# EAGLE board piezo-preamp-tickler_V3-4_single-supply-OPA164 (EAGLE 8.5.0)
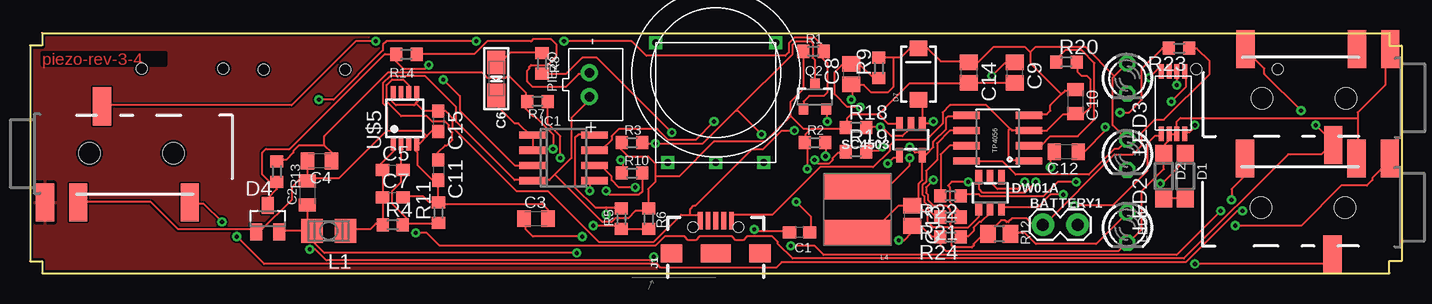
[diagram p0: board, top side]
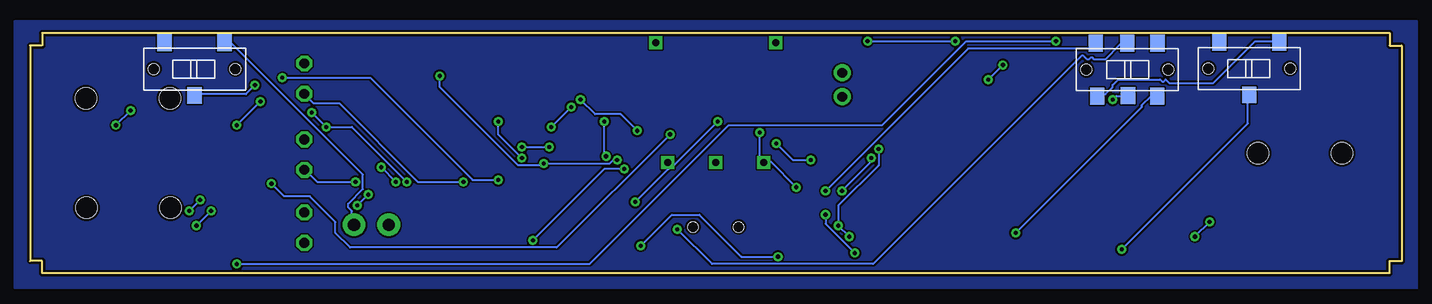
[diagram p1: board, bottom side, seen from below]

Size 114.3 x 20.03 mm. Coordinates in mm from the lower left corner, seen from the top.
Outline: 0,19 0,1 1.02,1 1.02,0 113.28,0 113.28,1.02 114.3,1.02 114.3,19 113.28,19 113.28,20.03 1,20.03 1,19 0,19
Copper layers (1*16): Top 0.035mm / dielectric 1.5mm / Bottom 0.035mm
Design rules "default *": minimum track width 6mil, minimum drill 0.35mm, track to track 6mil, track to pad 6mil, pad to pad 6mil, via to via 6mil, smd to smd 6mil, copper to edge 8mil, drill to drill 6mil, minimum pad ring 10mil, minimum via ring 8mil, stop-mask expansion 4mil, vias tented up to drill 20mil, thermal gap 10mil

## Footprints (pad centres in the part's own frame; a part is rotated, then mirrored left to right if it is on the bottom)
1X02_LOCK = drill 1.016 pad 1.88: 1 -0.178,0; 2 2.718,0
C0603 = smd 1.1 x 1: 1 -0.85,0; 2 0.85,0
C0805K = smd 1.1 x 1.4: 1 -1,0; 2 1,0
EIA3216-18/A-R = smd 1.95 x 1.5: + 1.375,0; - -1.375,0
C0805 = smd 1.3 x 1.5: 1 -0.85,0; 2 0.85,0
SOD123 = smd 1.4 x 1.4: A 1.9,0; C -1.9,0
SOT23 = smd 1 x 1.4: 1 -0.95,-1.1; 2 0.95,-1.1; 3 0,1.1
SMA-DIODE = smd 1.27 x 1.47: A -2.15,0; C 2.15,0
SOT23-6 = smd 0.55 x 1.2: 1 -0.95,-1.3; 2 0,-1.3; 3 0.95,-1.3; 4 0.95,1.3; 5 0,1.303; 6 -0.95,1.3
F8205A = smd 0.406 x 1.2: P$1 -0.975,-2.65; P$2 -0.325,-2.65; P$3 0.325,-2.65; P$4 0.975,-2.65; P$5 0.975,2.55; P$6 0.325,2.55; P$7 -0.325,2.55; P$8 -0.975,2.55
SO08 = smd 0.6 x 2.2: 1 -1.905,-2.6; 2 -0.635,-2.6; 3 0.635,-2.6; 4 1.905,-2.6; 5 1.905,2.6; 6 0.635,2.6; 7 -0.635,2.6; 8 -1.905,2.6
USB-B-MICRO-SMD_RED_PASTE = smd 1.45 x 0.4: D+ 2.725,0; D- 2.725,0.65; GND 2.725,-1.3; ID 2.725,-0.65; VBUS 2.725,1.3 | smd 1.5 x 1.8: SHIELD1 0,3.685; SHIELD2 0,-3.685 | smd 1.5 x 2.5: SHIELD3 0,0 | hole 0.85: 2.2,1.9; 2.2,-1.9
L3225P = smd 1.8 x 2: 1 -1.4,0; 2 1.4,0
CR54 = smd 5.5 x 2.15: P$1 0,1.92; P$2 0,-1.92
LED3MM = drill 0.813 octagon: A -1.27,0; K 1.27,0
JST-PH-2-THM = drill 0.8 pad 1.422: 1 1,0; 2 -1,0
SWITCH_SPDT_CL-SB-12B = smd 1.2 x 1.4: P$1 -2.5,-2.2; P$2 0,2.2; P$3 2.5,-2.2 | hole 0.9: -3.4,0; 3.4,0
SOT23-3 = smd 0.8 x 0.9: 1 -0.95,-1; 2 0.95,-1; 3 0,1.1
R0603 = smd 1 x 1.1: 1 -0.85,0; 2 0.85,0
R0805 = smd 1.3 x 1.5: 1 -0.95,0; 2 0.95,0
SOT23-5 = smd 0.55 x 1.2: 1 -0.95,-1.3; 2 0,-1.3; 3 0.95,-1.3; 4 0.95,1.3; 5 -0.95,1.3
AUDIO-JACK-TRRS-SMD = smd 1.524 x 3.175: EARTH -2.114,-5.271; RING1 2.644,2.759; RING2 0.66,-5.271; TIP 9.948,-5.271 | hole 1.778: 1.6,-1.15; 8.6,-1.15
SO08' = smd 0.61 x 2.21: 1 -1.905,-2.616; 2 -0.635,-2.616; 3 0.635,-2.616; 4 1.905,-2.616; 5 1.905,2.616; 6 0.635,2.616; 7 -0.635,2.616; 8 -1.905,2.616
SWITCH_DPDT_CL-SB-22B = smd 1.2 x 1.4: 1 -2.5,-2.2; 2 0.05,-2.17; 3 2.5,-2.2; 4 -2.63,2.2; 5 0,2.2; 6 2.51,2.2 | hole 0.9: -3.4,0; 3.4,0
POT-THUMB-14MM_ALPHA-RV100F-30-4K1B-B10K-B301 = drill 0.6 square: P$1 -4,-7.5; P$2 0,-7.5; P$3 4,-7.5; P$4 -5,2.5; P$5 5,2.5
MSOP-8 = smd 0.4 x 1: 1 -0.975,-2.2; 2 -0.325,-2.2; 3 0.325,-2.2; 4 0.975,-2.2; 5 0.975,2.2; 6 0.325,2.2; 7 -0.325,2.2; 8 -0.975,2.2

## Placement (x,y rotation side)
BATTERY1  [1X02_LOCK]  84.58,4.03 0 top
C1  10uF  [C0603]  64.14,3.4 180 top
C2  0.1uF  [C0805K]  23.11,6.7 90 top
C3  10uF  [C0805K]  42.16,4.54 0 top
C4  0.1uF  [C0805K]  24.13,9.37 180 top
C5  10nF  [C0603]  30.23,8.6 0 top
C6  100uF  [EIA3216-18/A-R]  38.86,16.22 270 top
C7  10uF  [C0603]  30.23,6.32 0 top
C8  2.2pf  [C0805]  68.45,16.61 90 top
C9  56nf  [C0805]  82.04,16.73 270 top
C10  0.1uF  [C0805K]  87.12,14.32 270 top
C11  10nF  [C0603]  34.04,8.6 270 top
C12  0.1uF  [C0805K]  86.36,10.13 180 top
C13  10uF  [C0805]  73.53,4.79 270 top
C14  68uF  [C0805]  78.23,16.73 270 top
C15  10uF  [C0603]  34.04,12.67 270 top
D1  [SOD123]  96.27,8.1 270 top
D2  [SOD123]  94.49,8.1 270 top
D4  BAT54S  [SOT23]  19.81,4.54 0 top
D7  10BQ015  [SMA-DIODE]  74.04,16.61 90 top
DW01A  DW01A  [SOT23-6]  80.01,6.7 0 top
F8205A  F8205A  [F8205A]  95.25,14.19 180 top
IC1  OPA1642  [SO08]  44.45,9.62 270 top
J1  [USB-B-MICRO-SMD_RED_PASTE]  57.15,1.65 90 top
L1  100uH  [L3225P]  24.89,3.52 180 top
L4  2.7uH  [CR54]  68.96,5.3 180 top
LED1  [LED3MM]  91.44,3.79 270 top
LED2  [LED3MM]  91.44,9.89 270 top
LED3  [LED3MM]  91.44,16.24 270 top
PIEZO  [JST-PH-2-THM]  46.61,15.72 270 top
POWER  SPDT  [SWITCH_SPDT_CL-SB-12B]  100.58,17.04 180 bottom
Q2  MMBFJ201  [SOT23-3]  65.41,14.7 0 top
R1  2.2K  [R0603]  65.28,18.51 0 top
R2  1.2K  [R0603]  65.41,10.89 0 top
R3  1M  [R0603]  50.16,10.89 0 top
R4  91.2k  [R0603]  30.23,4.03 0 top
R5  100K  [R0603]  49.28,4.54 90 top
R6  100K  [R0603]  51.56,4.54 270 top
R7  220  [R0603]  42.29,14.32 180 top
R8  220  [R0603]  42.67,17.49 270 top
R9  1M  [R0603]  70.74,17.11 90 top
R10  1K  [R0603]  50.16,8.35 0 top
R11  100k  [R0603]  34.04,5.05 90 top
R12  390  [R0805]  80.77,3.27 180 top
R13  10M  [R0603]  20.57,8.48 270 top
R14  100K  [R0603]  31.37,18.26 180 top
R18  100k  [R0603]  68.83,12.16 0 top
R19  15k  [R0603]  68.83,10.13 0 top
R20  1.2k  [R0603]  86.36,17.62 0 top
R21  1k  [R0603]  76.71,4.67 180 top
R22  1k  [R0603]  76.71,6.45 180 top
R23  nfo  [R0603]  95.76,18.76 180 top
R24  100  [R0603]  76.71,3.02 180 top
SC4503  VREG12_SOT23-5  [SOT23-5]  73.41,11.14 180 top
SW2-SPST  INPUT-select  [SWITCH_SPDT_CL-SB-12B]  12.7,17.08 180 bottom
TO-HEADSET  AUDIO-JACK3LGPADS  [AUDIO-JACK-TRRS-SMD]  3.37,11.16 0 top
TO-PHONE  AUDIO-JACK3LGPADS  [AUDIO-JACK-TRRS-SMD]  111.19,4.3 180 top
TO-PHONE1  AUDIO-JACK3LGPADS  [AUDIO-JACK-TRRS-SMD]  111.25,13.44 180 top
TP4056  TP4056-CHIP  [SO08']  80.64,11.27 90 top
U$2  SWITCH_DPDT  [SWITCH_DPDT_CL-SB-22B]  22.86,16.99 0 bottom
U$4  [POT-THUMB-14MM_ALPHA-RV100F-30-4K1B-B10K-B301]  57.15,16.73 0 top
U$5  TPS7A49  [MSOP-8]  31.24,12.92 0 top

## Library data of the parts
BATTERY1 = SparkFun-Connectors
C1-C5 C7-C15 PIEZO = adafruit
C6 = microbuilder
D1 D2 D4 = diode
D7 L4 = SparkFun
DW01A F8205A POWER Q2 R1-R14 R18-R24 SC4503 SW2-SPST TP4056 U$2 U$4 U$5 = CMU-ArtFab
IC1 = linear
J1 = SparkFun-Connectors; PROD_ID: CONN-11752
L1 = rcl; SPICEPREFIX: L
LED1-LED3 = led
TO-HEADSET TO-PHONE TO-PHONE1 = Daniel

## Nets
+12V: C5.1 C7.1 L1.1 R4.1 U$5.1
GND: C2.2 C3.2 C4.2 C7.2 C9.2 C11.2 C13.2 C14.2 C15.2 D2.C D4.1 F8205A.P$6 F8205A.P$7 IC1.4 LED1.K PIEZO.1 R1.1 R2.1 R3.1 R6.1 R11.2 R18.1 R24.2 SC4503.3 TO-HEADSET.RING2 TO-PHONE1.EARTH TO-PHONE.RING2 U$5.4
N$1: D1.A D2.A
N$2: PIEZO.2 R14.1
N$3: Q2.2 R2.2
N$4: TO-HEADSET.EARTH
N$5: IC1.5 R7.1
N$6: C1.1 IC1.7 U$4.P$3
N$7: IC1.6 R8.2 U$4.P$1
N$9: D4.3 IC1.3 R13.2 R14.2
N$10: D1.C Q2.3 R3.2 R10.1
N$11: R10.2 U$2.4
N$12: TO-PHONE1.RING1 TO-PHONE1.TIP U$2.3
N$13: TO-HEADSET.TIP TO-PHONE.TIP
N$14: C6.- R8.1
N$15: TO-HEADSET.RING1 TO-PHONE.RING1
N$16: C1.2 U$2.5
N$17: SW2-SPST.P$2 TO-PHONE.EARTH
N$18: LED1.A R12.1
N$19: SW2-SPST.P$1 U$2.1
N$20: F8205A.P$2 F8205A.P$3 POWER.P$2
N$21: BATTERY1.2 POWER.P$1
N$23: C3.1 C4.1 R5.1 R6.2 R7.2 R13.1
N$24: C6.+ IC1.1 IC1.2
N$25: C2.1 D4.2 IC1.8 L1.2 R5.2
N$26: C5.2 R4.2 R11.1 U$5.2
N$28: C11.1 U$5.6
N$29: C9.1 R19.1 SC4503.4
N$30: C8.2 R9.1 R18.2 SC4503.2
N$32: D7.A L4.P$2 SC4503.1
N$33: C10.2 J1.GND R20.2 TP4056.1 TP4056.3
N$34: DW01A.1 F8205A.P$4
N$35: R20.1 TP4056.2
N$36: DW01A.3 F8205A.P$5
N$37: R22.2 TP4056.7
N$38: R21.2 TP4056.6
N$39: LED3.K R21.1
N$40: LED2.K R22.1
N$41: C12.1 DW01A.5 R23.2
N$42: C12.2 DW01A.6
N$43: DW01A.2 R24.1
N$44: F8205A.P$1 F8205A.P$8
SELECT: Q2.1 R1.2 U$2.2
V+: C8.1 C10.1 C14.1 C15.1 D7.C J1.VBUS LED2.A LED3.A R9.2 TP4056.4 TP4056.8 U$5.5 U$5.8
VBAT: BATTERY1.1 C13.1 L4.P$1 R12.2 R19.2 R23.1 SC4503.5 TP4056.5

## Tracks (layer width: path | path; a pad name or v marks a point on that pad's centre or on a via)
+12V
  Top 0.152: U$5.1 30.33,10.67 30.33,10.21 29.26,9.14 29.26,8.69 C5.1 29.41,8.53 29.41,6.4 C7.1 29.41,6.25 29.41,4.12 R4.1 29.26,4.12 28.8,4.12 28.35,3.66 26.36,3.66 L1.1
GND  (via drill 0.35)
  Top 0.152: 110.64,12.95 110.64,13.41 112.93,15.7 112.93,18.29 113.23,18.59 TO-PHONE1.EARTH | 110.64,12.95 110.64,9.6 TO-PHONE.RING2 | 110.64,12.95 95.86,12.95 95.56,12.65 95.56,11.73 F8205A.P$7 95.56,11.58 94.94,11.58 F8205A.P$6 94.79,11.58 94.79,10.97 94.49,10.67 D2.C 94.49,8.69 92.66,6.86 92.66,3.66 91.44,2.44 LED1.K 91.44,2.59 90.68,1.83 76.35,1.83 75.89,2.29 75.89,2.9 R24.2 75.74,3.05 75.13,3.05 74.22,3.96 73.61,3.96 C13.2 73.46,3.81 73.46,3.35 72.85,2.74 v72.39,2.74 | 33.07,11.43 33.53,11.89 33.98,11.89 C15.2 | 33.07,11.43 32.46,10.82 32.31,10.82 U$5.4 32.16,10.67 32.16,10.21 32.31,10.06 32.31,8.99 33.53,7.77 33.98,7.77 C11.2 33.98,7.62 33.98,5.94 | 33.98,5.94 33.22,5.94 32.77,6.4 31.09,6.4 C7.2 | 33.98,5.94 R11.2 34.14,5.79 42.67,5.79 43.13,5.33 43.13,4.57 C3.2 | C2.2 23.01,7.77 22.4,7.77 21.79,7.16 21.79,6.1 19.2,3.5 18.9,3.5 D4.1 18.75,3.5 18.59,3.66 12.34,3.66 10.06,5.94 4.12,5.94 TO-HEADSET.RING2 | 23.16,7.92 23.16,7.77 C2.2 | 23.16,7.92 23.16,9.3 C4.2 | 33.07,11.43 32.61,11.89 29.72,11.89 | 29.72,11.89 25.76,7.92 23.16,7.92 | 23.16,7.92 C2.2 | 43.74,8.23 45.11,9.6 45.11,12.95 46.48,14.33 46.48,14.63 PIEZO.1 | 43.74,8.23 43.28,7.77 41.91,7.77 IC1.4 41.76,7.77 40.39,7.77 35.51,12.65 35.51,13.87 32.92,16.46 30.02,16.46 29.41,15.85 29.41,14.17 29.72,13.87 29.72,11.89 | 52.12,8.08 52.12,9.14 51.51,9.75 49.84,9.75 49.23,10.36 49.23,10.82 R3.1 | 52.12,8.08 52.12,7.62 51.51,7.01 51.51,5.49 R6.1 51.51,5.33 51.36,5.18 50.44,5.18 49.84,4.57 48.77,4.57 48.46,4.27 47.7,4.27 43.74,8.23 | C9.2 81.99,15.85 78.33,15.85 C14.2 78.18,15.85 73.3,15.85 70.71,13.26
  Top 0.152: 64.92,11.89 65.08,12.04 67.97,12.04 R18.1 68.12,12.19 68.12,12.95 68.43,13.26 70.71,13.26 | 64.92,11.89 64.62,11.58 64.62,10.97 R2.1 64.62,10.82 64.77,10.67 v64.77,8.69 | 63.4,13.11 63.4,14.33 64.47,15.39 64.47,18.44 R1.1 | 63.4,13.11 64.47,12.04 64.77,12.04 64.92,11.89 | 70.71,13.26 71.48,12.5 72.39,12.5 SC4503.3 | 52.12,8.08 54.1,8.08 57,10.97 61.27,10.97 63.4,13.11
  Bottom 0.152: v72.39,2.74 66.45,8.69 v64.77,8.69
N$1
  Top 0.152: D2.A 94.49,6.25 96.16,6.25 D1.A
N$2
  Top 0.152: R14.1 32.31,18.29 37.03,18.29 38.1,19.36 41.76,19.36 41.91,19.51 43.43,19.51 43.89,19.05 43.89,18.14 43.13,17.37 41.76,17.37 41.6,17.22 41.6,17.07 41.45,16.92 41.45,16 41.91,15.54 44.65,15.54 45.72,16.61 46.48,16.61 PIEZO.2
N$3  (via drill 0.35)
  Top 0.152: v66.45,12.65 66.45,13.56 Q2.2 | v66.29,9.75 66.29,10.82 R2.2
  Bottom 0.152: v66.45,12.65 66.45,9.91 v66.29,9.75
N$4
  pour Top: -1.27,21.05 -1.27,-1.27 115.57,-1.27 115.57,21.05
N$5  (via drill 0.35)
  Top 0.152: v44.2,9.6 44.2,11.43 43.13,12.5 43.13,14.17 R7.1 | v46.63,6.86 46.63,7.47 46.94,7.77 IC1.5
  Bottom 0.152: v44.2,9.6 44.2,9.3 v46.63,6.86
N$6  (via drill 0.35)
  Top 0.152: v63.86,5.94 65.08,4.72 65.08,3.5 C1.1 | v57,12.65 55.47,11.12 53.19,11.12 52.27,12.04 49.07,12.04 48.46,11.43 48.46,11.12 47.7,10.36 47.09,10.36 IC1.7
  Bottom 0.152: v63.86,5.94 61.11,8.69 61.11,8.99 | 61.11,8.99 61.11,9.14 U$4.P$3 61.11,8.99 | v57,12.65 60.66,8.99 61.11,8.99
N$7  (via drill 0.35)
  Top 0.152: v53.49,11.73 47.24,17.98 46.02,17.98 44.65,16.61 42.67,16.61 R8.2 | v50.44,7.16 49.07,7.16 48.46,7.77 48.46,8.08 47.7,8.84 47.09,8.84 IC1.6
  Bottom 0.152: v53.49,11.73 53.49,9.6 53.19,9.3 U$4.P$1 53.03,9.3 52.58,9.3 v50.44,7.16
N$8
  pour Bottom: -1.27,21.05 -1.27,-1.27 115.57,-1.27 115.57,21.05
N$9  (via drill 0.35)
  Top 0.152: R13.2 20.57,7.01 19.81,6.25 D4.3 | R13.2 19.96,7.62 19.36,8.23 19.36,10.06 19.66,10.36 21.64,10.36 29.57,18.29 30.48,18.29 R14.2 30.48,18.14 30.48,17.68 31.09,17.07 32.92,17.07 v33.22,17.37 | R13.2 | v34.44,16.15 35.81,14.78 35.81,13.56 40.39,8.99 41.76,8.99 IC1.3
  Bottom 0.152: v33.22,17.37 v34.44,16.15
N$10  (via drill 0.35)
  Top 0.152: 58.83,13.56 56.08,10.82 v52.12,10.82 51.05,10.82 R3.2 | 58.83,13.56 63.55,18.29 63.55,19.05 63.86,19.36 65.08,19.36 65.23,19.2 65.23,17.98 65.38,17.83 65.38,15.85 Q2.3 | v49.23,9.45 49.38,9.3 49.38,8.38 R10.1 | v94.18,7.47 94.34,7.47 96.16,9.3 96.16,9.91 D1.C | v60.96,11.58 58.98,13.56 58.83,13.56
  Bottom 0.152: v49.23,9.45 50.75,9.45 v52.12,10.82 | v94.18,7.47 93.12,6.4 90.98,6.4 88.85,4.27 88.85,3.35 87.63,2.13 70.41,2.13 v60.96,11.58
N$11  (via drill 0.35)
  Top 0.152: v48.01,6.86 48.31,6.55 50.75,6.55 51.05,6.86 51.05,8.23 R10.2
  Bottom 0.152: v48.01,6.86 36.12,18.75 25.91,18.75 25.6,19.05 U$2.4
N$12  (via drill 0.35)
  Top 0.152: v32.16,3.35 33.07,3.35 34.14,2.29 52.12,2.29 52.88,3.05 54.56,3.05 54.86,2.74 55.47,2.74 55.78,3.05 58.52,3.05 58.83,2.74 59.44,2.74 59.74,3.05 61.87,3.05 62.33,2.59 62.33,2.44 63.55,1.22 96.16,1.22 104.85,9.91 107.59,9.91 108.51,10.82 TO-PHONE1.RING1 108.66,10.82 v107.14,12.34 | v105.92,13.56 102.87,16.61 102.87,17.07 101.35,18.59 TO-PHONE1.TIP
  Bottom 0.152: v32.16,3.35 21.64,13.87 21.64,14.02 20.88,14.78 20.42,14.78 U$2.3 | v107.14,12.34 v105.92,13.56
N$13  (via drill 0.35)
  Top 0.152: v16,4.27 14.48,5.79 13.41,5.79 TO-HEADSET.TIP | v17.22,3.05 19.51,0.76 52.27,0.76 52.58,0.46 62.18,0.46 62.64,0.91 96.32,0.91 100.58,5.18 v101.04,5.18 | v100.13,6.1 100.13,7.01 101.19,8.08 101.19,9.45 TO-PHONE.TIP
  Bottom 0.152: v17.22,3.05 v16,4.27 | v100.13,6.1 v101.04,5.18
N$14
  Top 0.152: R8.1 42.67,18.44 40.08,18.44 39.32,17.68 38.86,17.68 C6.-
N$15  (via drill 0.35)
  Top 0.152: v28.8,19.36 27.13,19.36 21.79,14.02 6.1,14.02 TO-HEADSET.RING1 | v97.08,0.76 107.75,0.76 108.51,1.52 TO-PHONE.RING1
  Bottom 0.152: v28.8,19.36 36.27,19.36 43.28,12.34 56.08,12.34 67.67,0.76 v97.08,0.76
N$16  (via drill 0.35)
  Top 0.152: v60.35,3.66 60.5,3.5 63.25,3.5 C1.2
  Bottom 0.152: v60.35,3.66 57.45,0.76 44.04,0.76 26.67,18.14 26.52,18.14 26.21,17.83 26.06,17.83 25.91,17.98 25.76,17.98 25.6,17.83 24.69,17.83 23.47,19.05 22.86,19.05 U$2.5
N$17  (via drill 0.35)
  Top 0.152: v23.32,1.98 23.77,1.98 24.69,1.07 51.66,1.07 v51.97,1.37 | v63.4,2.29 65.38,2.29 66.14,1.52 95.56,1.52 v99.21,5.18 | v100.43,3.96 105.92,3.96 109.27,7.32 111.4,7.32 111.86,7.77 111.86,7.92 113.39,9.45 TO-PHONE.EARTH
  Bottom 0.152: v23.32,1.98 12.8,12.5 12.8,14.78 SW2-SPST.P$2 | v51.97,1.37 55.02,1.37 58.52,4.88 60.81,4.88 v63.4,2.29 | v100.43,3.96 v99.21,5.18
N$18
  Top 0.152: R12.1 81.84,3.35 82.91,3.35 83.82,2.44 88.85,2.44 91.44,5.03 LED1.A
N$19
  Bottom 0.152: SW2-SPST.P$1 10.21,19.36 12.19,19.36 15.7,15.85 19.36,15.85 19.66,16.15 19.81,16 19.96,16 20.12,16.15 23.62,16.15 24.08,15.7 24.08,15.54 24.69,14.94 25.3,14.94 U$2.1
N$20  (via drill 0.35)
  Top 0.152: F8205A.P$3 94.94,16.92 95.56,16.92 F8205A.P$2 95.56,16.76 v95.56,15.7
  Bottom 0.152: v95.56,15.7 96.32,14.94 100.58,14.94 POWER.P$2
N$21
  Bottom 0.152: POWER.P$1 97.99,19.2 97.54,19.2 86.56,8.23 86.56,7.01 87.78,5.79 87.78,5.49 87.48,5.18 87.48,4.27 87.33,4.12 BATTERY1.2
N$23  (via drill 0.35)
  Top 0.152: R6.2 51.51,3.66 49.38,3.66 R5.1 49.23,3.81 49.07,3.96 v46.94,3.96 | v46.02,3.05 41.91,3.05 41.3,3.66 41.3,4.42 C3.1 | 24.54,10.67 22.4,10.67 21.95,10.21 21.95,10.06 21.34,9.45 20.57,9.45 R13.1 | 24.54,10.67 25.15,10.06 25.15,9.45 C4.1 | 24.54,10.67 24.54,11.43 29.87,16.76 37.64,16.76 38.1,16.31 39.62,16.31 39.78,16.46 39.93,16.46 41.3,15.09 41.3,14.33 R7.2 41.3,14.17 41.3,13.72 41.91,13.11 42.06,13.11 43.59,11.58 v43.59,10.36
  Bottom 0.152: v46.02,3.05 v46.94,3.96 46.94,5.64 43.59,8.99 v43.59,10.36
N$24
  Top 0.152: C6.+ 38.86,14.02 40.39,12.5 40.69,12.5 41.76,11.43 IC1.1 41.91,11.43 41.91,10.36 IC1.2
N$25  (via drill 0.35)
  Top 0.152: 23.16,3.5 23.47,3.5 L1.2 | 23.16,3.5 20.88,3.5 D4.2 | 23.16,3.5 23.16,5.64 C2.1 | 23.16,3.5 L1.2 | 48.01,5.49 47.09,5.49 45.41,7.16 45.41,11.28 45.72,11.58 46.94,11.58 IC1.8 | 48.01,5.49 49.23,5.49 R5.2 | v45.57,1.68 24.54,1.68 23.62,2.59 23.62,3.5 L1.2 | 48.01,5.49 v48.01,4.88
  Bottom 0.152: v45.57,1.68 48.01,4.12 v48.01,4.88
N$26
  Top 0.152: U$5.2 30.94,10.67 30.94,8.69 C5.2 30.94,8.53 30.94,7.62 30.18,6.86 30.18,5.79 31.39,4.57 31.39,4.12 | 31.39,4.12 33.98,4.12 R11.1 | 31.39,4.12 31.09,4.12 R4.2 31.39,4.12
N$28
  Top 0.152: U$5.6 31.55,15.24 31.55,15.7 31.09,16.15 30.18,16.15 29.72,15.7 29.72,14.33 30.94,13.11 33.07,13.11 33.53,12.65 34.59,12.65 34.9,12.34 34.9,12.04 35.2,11.73 35.2,11.12 34.75,10.67 34.59,10.67 33.98,10.06 33.98,9.6 C11.1
N$29  (via drill 0.35)
  Top 0.152: v65.38,9.45 65.68,9.14 66.6,9.14 66.9,9.45 66.9,9.6 67.36,10.06 67.97,10.06 R19.1 | v71.48,9.14 71.93,9.6 72.39,9.6 72.54,9.75 SC4503.4 | v80.16,16.46 81.23,17.53 81.99,17.53 C9.1
  Bottom 0.152: v65.38,9.45 65.68,9.45 65.99,9.14 v71.48,9.14 71.63,8.99 73.61,8.99 80.16,15.54 v80.16,16.46
N$30  (via drill 0.35)
  Top 0.152: R9.1 70.71,16.31 70.26,16.31 69.19,17.37 68.58,17.37 C8.2 68.43,17.37 67.67,17.37 67.06,16.76 67.06,14.94 68.12,13.87 v69.19,13.87 | R18.2 69.8,12.19 v70.87,12.19 71.02,12.19 71.78,11.43 72.69,11.43 73.3,12.04 73.3,12.34 SC4503.2
  Bottom 0.152: v70.87,12.19 v69.19,13.87
N$32  (via drill 0.35)
  Top 0.152: 74.37,12.5 74.37,14.02 74.07,14.33 D7.A | 74.37,12.5 75.13,12.5 v75.29,12.65 | v73.3,9.6 73.3,8.99 71.63,7.32 69.04,7.32 L4.P$2 | 74.37,12.5 SC4503.1
  Bottom 0.152: v75.29,12.65 75.29,11.58 v73.3,9.6
N$33
  Top 0.152: R20.2 87.33,17.53 87.33,16.76 87.63,16.46 88.09,16.46 88.39,16.15 88.39,13.87 87.78,13.26 87.17,13.26 C10.2 87.02,13.26 86.11,13.26 84.73,11.89 83.36,11.89 TP4056.3 83.21,11.89 81.84,11.89 81.69,12.04 | 81.69,12.04 79.7,14.02 76.66,14.02 76.05,13.41 76.05,12.5 74.68,11.12 72.08,11.12 71.63,10.67 71.63,10.21 70.26,8.84 65.84,8.84 61.87,4.88 58.67,4.88 58.52,4.72 58.52,4.42 J1.GND | 81.69,12.04 81.53,11.89 81.53,9.6 81.69,9.45 83.21,9.45 TP4056.1
N$34  (via drill 0.35)
  Top 0.152: v75.29,7.77 74.68,7.16 74.68,6.71 74.83,6.55 74.83,6.1 75.29,5.64 76.35,5.64 76.66,5.33 76.66,5.18 76.81,5.03 76.81,4.27 76.66,4.12 76.96,3.81 78.18,3.81 79.1,4.72 79.1,5.33 DW01A.1 | v93.27,16.31 94.03,17.07 94.18,17.07 94.34,16.92 F8205A.P$4
  Bottom 0.152: v75.29,7.77 77.42,7.77 85.95,16.31 v93.27,16.31
N$35
  Top 0.152: R20.1 85.65,17.68 85.65,17.98 86.26,18.59 87.63,18.59 88.7,17.53 88.7,12.8 87.33,11.43 85.04,11.43 84.28,10.67 83.36,10.67 TP4056.2
N$36  (via drill 0.35)
  Top 0.152: v86.11,6.55 85.04,6.55 83.97,5.49 81.08,5.49 DW01A.3 | v87.02,5.64 90.22,5.64 93.12,8.53 93.12,10.82 93.73,11.43 94.18,11.43 94.34,11.58 F8205A.P$5
  Bottom 0.152: v87.02,5.64 v86.11,6.55
N$37
  Top 0.152: R22.2 75.89,6.55 75.89,9.91 76.66,10.67 78.03,10.67 TP4056.7
N$38
  Top 0.152: R21.2 75.74,4.72 75.44,4.72 74.83,5.33 74.83,5.64 74.52,5.94 74.52,6.4 74.37,6.55 74.37,7.32 74.68,7.62 74.68,8.53 75.59,9.45 75.59,10.82 76.66,11.89 78.03,11.89 TP4056.6
N$39  (via drill 0.35)
  Top 0.152: v78.18,7.62 76.81,7.62 76.5,7.32 76.66,7.16 76.66,5.94 77.42,5.18 77.42,4.72 R21.1
  Bottom 0.152: v78.18,7.62 81.99,7.62 88.54,14.17 90.68,14.17 91.44,14.94 LED3.K
N$40  (via drill 0.35)
  Top 0.152: v87.17,7.62 85.65,7.62 84.43,6.4 79.25,6.4 79.1,6.55 77.57,6.55 R22.1
  Bottom 0.152: v87.17,7.62 90.37,7.62 91.44,8.69 LED2.K
N$41  (via drill 0.35)
  Top 0.152: v90.83,13.41 91.59,13.41 92.66,14.48 92.66,17.07 94.34,18.75 94.79,18.75 R23.2 | v89.61,12.19 89.61,11.89 87.94,10.21 87.48,10.21 C12.1 | DW01A.5 80.01,7.62 80.62,7.01 82.3,7.01 v82.91,7.62
  Bottom 0.152: v90.83,13.41 v89.61,12.19 87.48,12.19 v82.91,7.62
N$42  (via drill 0.35)
  Top 0.152: v83.82,7.62 82.91,6.71 79.4,6.71 79.1,7.01 79.1,7.92 DW01A.6 | v85.04,8.84 85.04,9.75 85.34,10.06 C12.2
  Bottom 0.152: v85.04,8.84 v83.82,7.62
N$43
  Top 0.152: DW01A.2 80.01,5.03 79.25,4.27 79.1,4.27 78.64,3.81 78.64,3.5 78.18,3.05 77.57,3.05 R24.1
N$44  (via drill 0.35)
  Top 0.152: v97.08,12.34 97.08,12.19 96.62,11.73 96.32,11.73 F8205A.P$8 | v95.1,14.33 96.32,15.54 96.32,16.76 F8205A.P$1
  Bottom 0.152: v95.1,14.33 v97.08,12.34
SELECT  (via drill 0.35)
  Top 0.152: Q2.1 64.47,13.72 64.47,14.33 64.92,14.78 66.14,14.78 66.45,15.09 66.45,17.53 65.99,17.98 65.99,18.44 R1.2 65.99,18.59 65.99,19.05 65.38,19.66 63.7,19.66 63.25,19.2 63.25,18.44 62.94,18.14 51.36,18.14 50.14,19.36 v44.5,19.36 | v24.08,14.48 25.3,14.48 29.41,18.59 29.41,19.05 29.72,19.36 v37.19,19.36
  Bottom 0.152: v24.08,14.48 23.77,14.78 22.86,14.78 U$2.2 | v44.5,19.36 v37.19,19.36
V+  (via drill 0.35)
  Top 0.152: 91.44,11.12 90.68,10.36 90.37,10.36 88.24,8.23 82.14,8.23 81.08,9.3 78.03,9.3 TP4056.8 | 90.37,16.46 90.22,16.31 90.22,12.34 91.44,11.12 | 90.37,16.46 90.98,17.07 91.14,17.07 91.44,17.37 LED3.A | 91.44,11.12 LED2.A | 85.95,14.94 85.04,14.02 85.04,13.56 84.73,13.26 83.36,13.26 TP4056.4 | 85.95,14.94 86.26,15.24 87.02,15.24 C10.1 | 71.93,17.98 72.54,17.98 73.3,18.75 73.91,18.75 D7.C 74.07,18.75 74.83,18.75 75.89,17.68 78.18,17.68 C14.1 78.33,17.53 78.94,17.53 80.31,18.9 82.91,18.9 83.36,18.44 | 71.93,17.98 70.87,17.98 R9.2 | 68.58,15.7 69.49,15.7 70.1,15.09 71.48,15.09 71.93,15.54 71.93,17.98 | 85.95,14.94 83.36,17.53 83.36,18.44 | 90.37,16.46 87.94,18.9 83.82,18.9 83.36,18.44 | 32.16,14.17 32.31,14.33 32.31,15.09 U$5.5 | 32.16,14.17 32,14.02 30.48,14.02 30.18,14.33 30.18,15.09 U$5.8 | 32.16,14.17 32.77,13.56 33.98,13.56 C15.1 34.14,13.56 34.59,13.56 35.2,12.95 35.2,12.19 40.54,6.86 43.13,6.86 47.4,2.59 51.97,2.59 54.25,4.88 55.02,4.88 | 55.02,4.88 55.63,4.88 55.78,4.72 55.78,4.42 J1.VBUS | 68.58,15.7 68.58,14.63 v68.43,14.48 | v63.7,11.89 62.64,11.89 61.11,10.36 60.2,10.36 55.47,5.64 55.32,5.64 55.02,5.33 55.02,4.88 | 68.58,15.7 C8.1
  Bottom 0.152: v68.43,14.48 67.21,13.26 65.08,13.26 v63.7,11.89
VBAT  (via drill 0.35)
  Top 0.152: v71.02,10.52 70.71,10.21 69.8,10.21 R19.2 | v73.3,10.52 73.76,10.06 74.22,10.06 74.37,9.91 | 74.37,9.91 74.68,9.91 75.29,10.52 75.29,10.97 76.35,12.04 76.35,12.95 76.5,13.11 78.03,13.11 TP4056.5 | 74.37,9.91 SC4503.5 74.37,9.75 74.37,7.77 74.07,7.47 74.07,6.25 73.76,5.94 | C13.1 73.46,5.64 72.39,5.64 70.26,3.5 69.04,3.5 L4.P$1 | 73.76,5.94 73.61,5.79 C13.1 | R23.1 96.62,18.75 97.23,18.75 98.3,17.68 98.3,16.61 94.49,12.8 93.73,12.8 92.66,11.73 92.66,10.67 91.9,9.91 90.37,9.91 84.43,3.96 BATTERY1.1 84.28,4.12 83.52,4.12 83.06,4.57 81.84,4.57 81.53,4.27 81.38,4.27 81.23,4.42 80.92,4.42 79.86,3.35 R12.2 79.7,3.2 79.4,3.2 78.64,2.44 78.64,2.29 78.49,2.13 76.96,2.13 76.81,2.29 76.81,3.5 76.5,3.81 75.29,3.81 74.83,4.27 74.83,4.88 73.76,5.94 | 73.76,5.94 C13.1
  Bottom 0.152: v73.3,10.52 v71.02,10.52

## Text on the board
Top: piezo-rev-3-4